# EAGLE board whistlev2 (EAGLE 6.2)
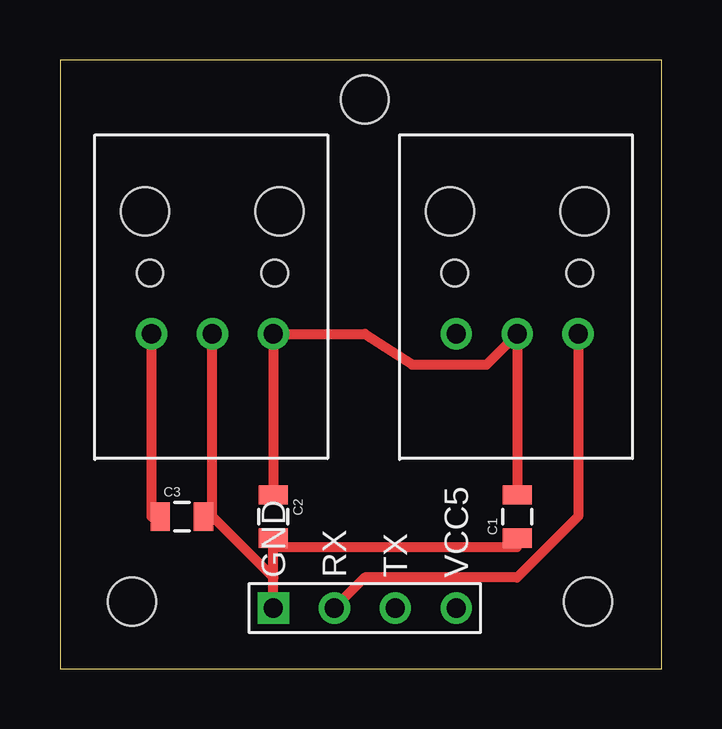
[diagram p0: board, top side]
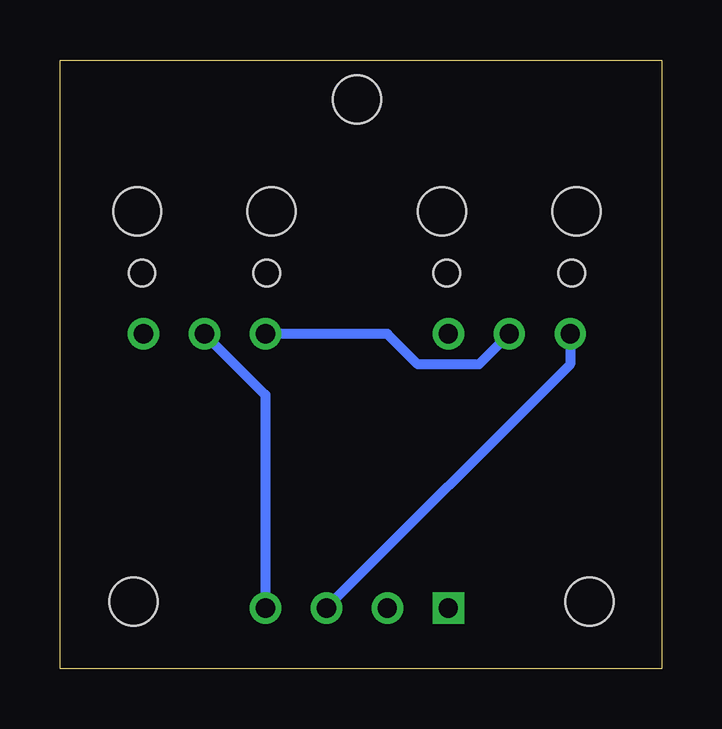
[diagram p1: board, bottom side, seen from below]

Size 25.07 x 25.39 mm. Coordinates in mm from the lower left corner, seen from the top.
Outline: 0,0 25.07,0 25.07,25.39 0,25.39 0,0
Copper layers (1*16): Top 0.035mm / dielectric 1.5mm / Bottom 0.035mm
Design rules: minimum track width 10mil, minimum drill 24mil, track to track 6mil, track to pad 8mil, pad to pad 8mil, via to via 8mil, smd to smd 8mil, copper to edge 40mil, drill to drill 8mil, minimum pad ring 10mil, minimum via ring 8mil, stop-mask expansion 4mil, vias tented up to drill 0mil, thermal gap 10mil
Holes 2 mm at 3,2.8 22,2.8 12.7,23.75

## Footprints (pad centres in the part's own frame; a part is rotated, then mirrored left to right if it is on the bottom)
0805 = smd 0.8 x 1.2: 1 -0.9,0; 2 0.9,0
DLR = drill 0.8: GND 0,0; VCC 0,-2.54; VOUT 0,2.54 | hole 1.1: 2.54,2.6; 2.54,-2.6 | hole 2: 5.1,2.8; 5.1,-2.8
DLT = drill 0.8: GND 0,2.54; VCC 0,0; VIN 0,-2.54 | hole 1.1: 2.54,2.6; 2.54,-2.6 | hole 2: 5.1,2.8; 5.1,-2.8
RS-232 = drill 0.8 square: GND 0,0 | drill 0.8: RX 2.54,0; TX 5.08,0; VCC 7.62,0

## Placement (x,y rotation side)
C1  .1uf  [0805]  19.05,6.35 90 top
C2  .1uf  [0805]  8.89,6.35 270 top
C3  30pf  [0805]  5.08,6.35 0 top
U$1  DLR1160  [DLR]  6.35,13.97 90 top
U$2  DLT1160  [DLT]  19.05,13.97 90 top
U$3  RS  [RS-232]  8.89,2.54 0 top

## Library data of the parts
C1-C3 = SparkFun-Passives
U$1-U$3 = TOS

## Nets
N$1: C1.2 C2.1 U$1.VCC U$2.VCC U$3.VCC
N$2: C1.1 C2.2 C3.2 U$1.GND U$2.GND U$3.GND
N$4: C3.1 U$1.VOUT U$3.TX
N$5: U$2.VIN U$3.RX

## Tracks (layer width: path | path; a pad name or v marks a point on that pad's centre or on a via)
N$1
  Top 0.406: C2.1 U$1.VCC 12.7,13.97 14.67,12.69 17.78,12.69 U$2.VCC C1.2
  Bottom 0.406: U$3.VCC 16.51,11.43 U$2.VCC
N$2
  Top 0.254: 19.05,5.08 C1.1 | 8.89,5.08 C2.2 | 6.35,6.35 C3.2
  Top 0.406: U$3.GND 8.89,3.81 | 8.89,3.81 8.89,5.08 19.05,5.08 | 8.89,3.81 6.35,6.35 U$1.GND
  Bottom 0.406: U$2.GND 11.43,13.97 10.16,12.7 7.62,12.7 U$1.GND
N$4
  Top 0.254: 3.81,6.35 C3.1
  Top 0.406: U$1.VOUT 3.81,6.35
  Bottom 0.406: U$3.TX 3.81,12.7 U$1.VOUT
N$5
  Top 0.406: U$3.RX 12.7,3.81 19.05,3.81 21.59,6.35 U$2.VIN